# Altium PCB uartto485.PcbDoc
Units mil, origin at the board's own origin, x right, y up, seen from the top; angles counter-clockwise.
Board outline 2755.91 x 1751.97 mil, 2 copper layers (Top Layer, Bottom Layer); 14 components, 9 nets, 42 pads, 5 vias.
Unrouted connection lines stored in the file: 1.
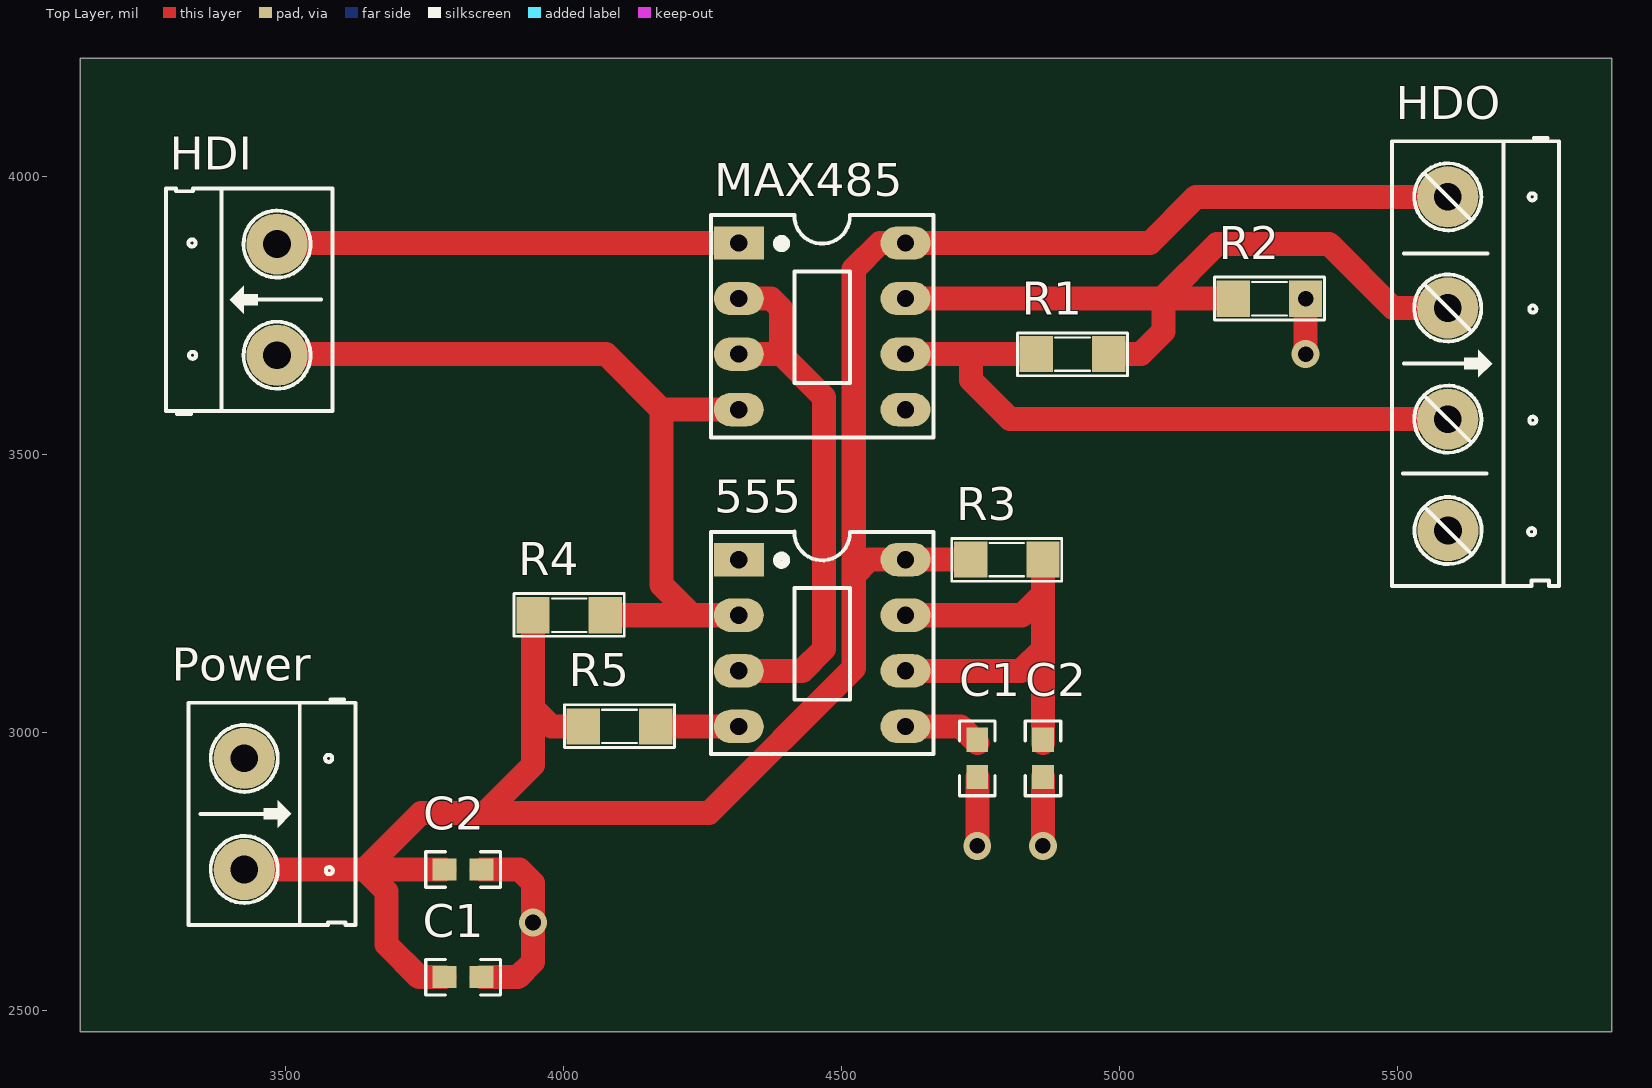
[diagram p0: Top Layer view]
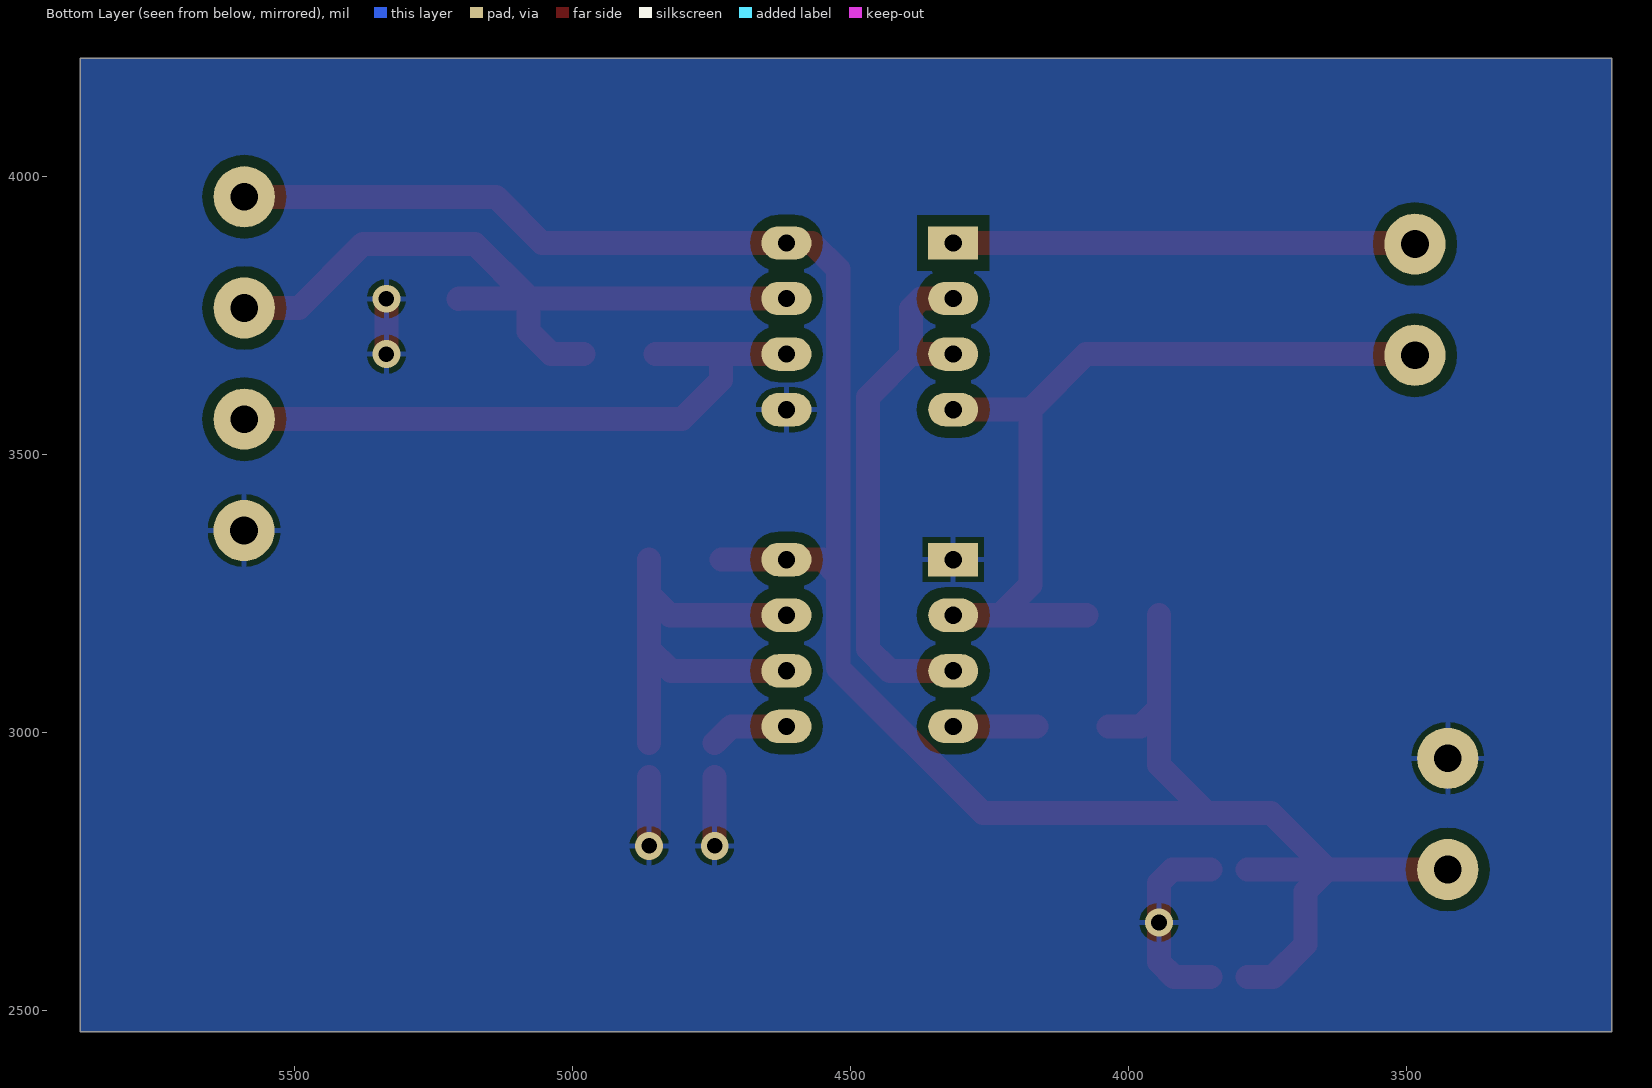
[diagram p1: Bottom Layer view, seen from below]
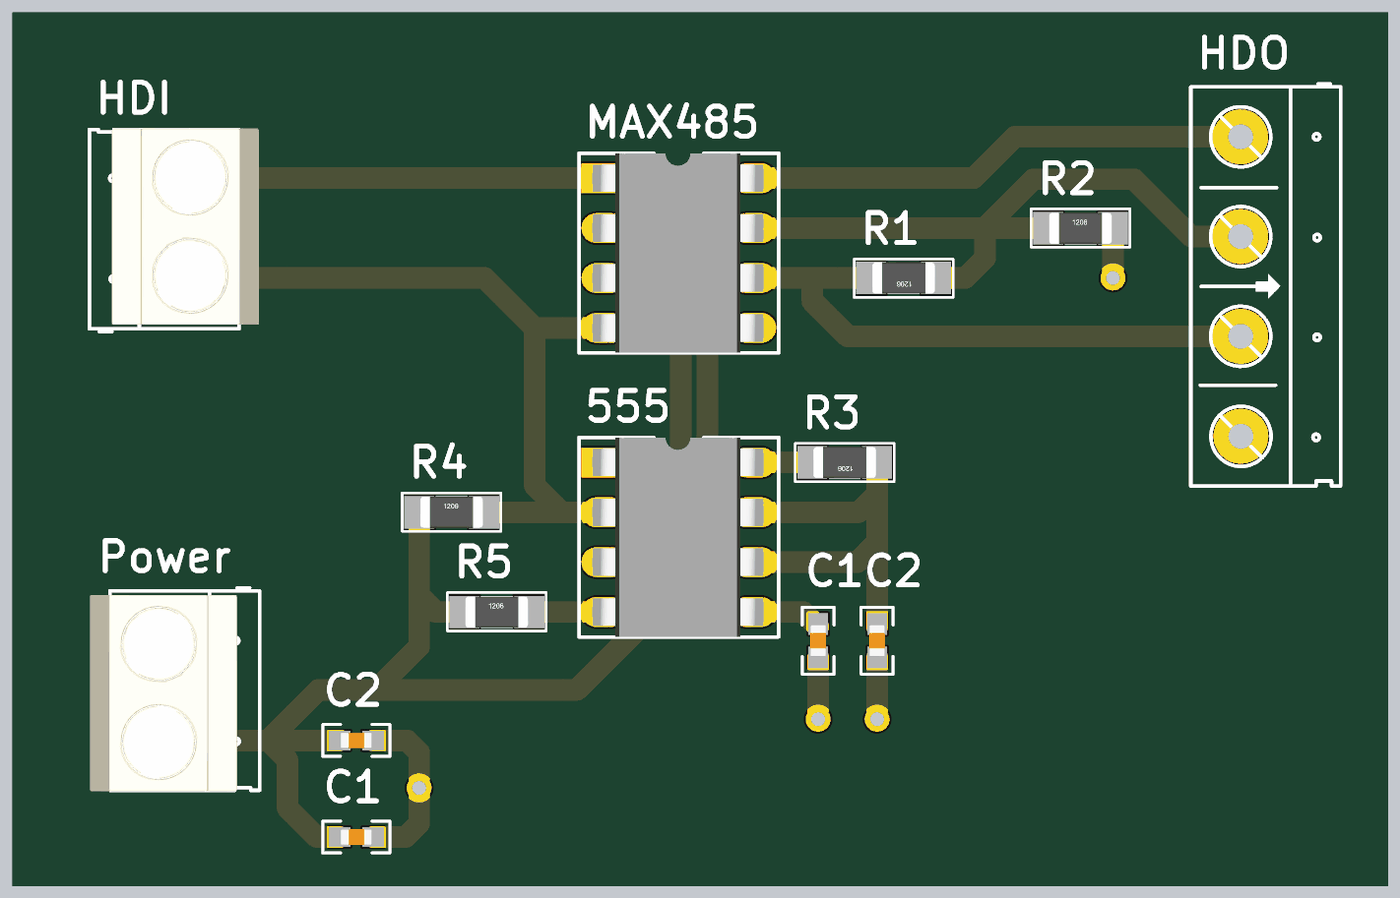
[diagram p2: 3D render of the assembled board from above, using the file's embedded part models]

## Layer stack, top to bottom
Top Solder: solder mask 0.4, Solder Resist, Dk 3.5
Top Layer: signal copper 1.4
Dielectric 1: dielectric 12.6, FR-4, Dk 4.8
Bottom Layer: signal copper 1.4
Bottom Solder: solder mask 0.4, Solder Resist, Dk 3.5

## Board outline
3129.92,4212.6 5885.83,4212.6 5885.83,2460.63 3129.92,2460.63

## Design rules (kind name [scope] priority, off if disabled: settings)
Clearance Clearance_1 [InNamedPolygon('Bottom Layer-No Net')] p1: gap=10 ignorepadtopadclearanceinfootprint=FALSE except(0: Arc-Hole Track-Hole SMDPad-Hole THPad-Hole Via-Hole Fill-Hole Poly-Hole Region-Hole Text-Hole; 20: Arc-Fill Arc-Poly Arc-Region Track-Fill Track-Poly Track-Region THPad-Fill THPad-Poly THPad-Region)
Clearance [All] p2: gap=10 ignorepadtopadclearanceinfootprint=FALSE except(0: Arc-Hole Track-Hole SMDPad-Hole THPad-Hole Via-Hole Fill-Hole Poly-Hole Region-Hole Text-Hole)
PolygonConnect PolygonConnect_2 [All vs IsNamedPolygon('Bottom Layer-No Net')] p1: connectstyle=Relief reliefconductorwidth=10 reliefentries=4 polygonreliefangle="90 Angle" airgapwidth=10
PolygonConnect PolygonConnect_1 [All vs IsNamedPolygon('Bottom Layer-No Net')] p2: connectstyle=Relief reliefconductorwidth=7.87 reliefentries=4 polygonreliefangle="90 Angle" airgapwidth=11.81
PolygonConnect [All] p3: connectstyle=Relief reliefconductorwidth=10 reliefentries=4 polygonreliefangle="90 Angle" airgapwidth=10
RoutingVias [All] p1: holewidth=28 width=50 viastyle="Through Hole" minholewidth=28 minwidth=50 maxholewidth=28 maxwidth=50
SolderMaskExpansion [All] p1: expansion=4
Width [All] p1: maxlimit=43.31 minlimit=35.43 preferedwidth=39.37
30 further rules are at their usual default settings.

## Classes and differential pairs
component class power: C1 C2 Power
component class uartto485: 555 C1 C2 HDI HDO MAX485 R1 R2 R3 R4 R5

## Components (designator, comment, footprint, x,y, rotation, side; value= is the part's Value field where it differs from the comment)
555 "LM555" DIP8/W0.3 4315,3310.24 r270 top
C1 "22uF" "CAPC-0603 (1608)" 3818.9,2559.06 r180 top value=33p/50V
C1 "10uF" "CAPC-0603 (1608)" 4744.09,2952.76 r90 top value=33p/50V
C2 "10uF" "CAPC-0603 (1608)" 4862.2,2952.76 r90 top value=33p/50V
C2 "22uF" "CAPC-0603 (1608)" 3818.9,2752.76 r180 top value=33p/50V
HDI "Header 2_1" HED2 3484.25,3677.95 r90 top value="Header 2"
HDO "Header 4" HED4 5590.49,3963.05 r270 top
MAX485 "MAX485" DIP8/W0.3 4315,3880 r270 top
Power "Header 2_1" HED2 3425.2,2952.76 r270 top value="Header 2"
R1 "120" SM-RES-1206 4980.31,3680 r180 top value="R1/4W - 1K"
R2 "20k" SM-RES-1206 5204.65,3779.53 r0 top value="R1/4W - 1K"
R3 "47k" SM-RES-1206 4862.2,3310.24 r180 top value="R1/4W - 1K"
R4 "10k" SM-RES-1206 3944.8,3210.24 r0 top value="R1/4W - 1K"
R5 "1k" SM-RES-1206 4035.43,3010.24 r0 top value="R1/4W - 1K"

## Footprints (in the part's own frame and the unit in brackets; to place one, negate y for a bottom-side part, rotate by r counter-clockwise, add the part's x,y. Pads: shape width x height; smd on the part's side, far side on the other; paste and mask are expansions set on the pad)
"CAPC-0603 (1608)" [mm] "Resistor, Chip; 1.60 mm L X 0.80 mm W X 0.50 mm H body"
  rect 1.1x1 smd mask+0.1: 1(-0.85,0) 2(0.85,0)
  silkscreen extent -1.71,-0.81 1.71,0.81, body extent -0.8,-0.4 0.8,0.4, height 0.6
DIP8/W0.3 [mil] "8 PIN, W 300mil, Pin to pin 100mil"
  rect 60x90 hole 31: 1(0,0)
  oval 60x90 hole 31: 2(100,0) 3(200,0) 4(300,0) 5(300,300) 6(200,300) 7(100,300) 8(0,300)
  silkscreen extent -50,-50 350,350, body extent -50,-40 350,336, height 201
HED2 [mil] "Header 2, 2 pin, hight 300mil, Pin to Pin 200, Colour Green"
  round 110 hole 50: 1(0,0) 2(200,0)
  silkscreen extent -106,-100 300,200, body extent -92,-140 302,155, height 394
HED4 [mil] "Header 4, 4 pin, hight 300mil, Pin to Pin 200, Colour Green"
  round 110 hole 50: 1(0,0) 2(200,0) 3(400.06,0.06) 4(600.39,0.39)
  silkscreen extent -106,-100 700,200
SM-RES-1206 [mil]
  rect 60x65 smd: 1(0,0) 2(130,0)
  silkscreen extent -34,-38 164,39, body extent 2,-31 128,32, height 40

## Part data
555: "Timer"
C1 C1 C2 C2: library part 0603N330J500CT, "CAP CER 33pF 50V 5%  0603", MPN="CL10C330JB8NNNC, 0603N330J500CT", Category=CAPACITOR, CompanyID=VT-01106, PinCount=2, Solder=SMT
HDI Power: "Header, 2-Pin", Manufacturer="Generic Components", Class=Connector
HDO: library part Hed4, "Header 4 (Green)"
MAX485: "RS232 - RS485 (Same sn75176)"
R1 R2 R3 R4 R5: library part R, "Resistor 1/4W"

## Via types
v1: diameter 50, hole 28, Top Layer to Bottom Layer, 5 vias

## Nets (pads, with @x,y where several pads share a name; then routed paths per layer and width w, separated by ;. In a path a pad name is that pad's centre, name@x,y a point inside that pad or via, vN(x,y) a via of type N, cw(c..) or ccw(c..) an arc to the next point about the centre after c; other vN are vias at no path point)
GND: 555.1 C1.1 C2.1 HDO.4 MAX485.5 Power.1 R2.2 | length 695.8
  Top Layer w43.31: C1.1@3852.36,2559.06 3917.32,2559.06 3944.8,2586.54 3944.8,2728.43 3920.47,2752.76 C2.1@3852.36,2752.76 ; v1(4744.09,2795.28) C1.1@4744.09,2919.29 ; v1(4862.2,2795.28) C2.1@4862.2,2919.29 ; v1(5334.65,3680) v1(5334.65,3779.53)
  other v1: 3944.8,2657.48
Net555_2: 555.2 HDI.1 MAX485.4 R4.2 | length 1524.5
  Top Layer w43.31: HDI.1@3464.57,3680 4075.91,3680 4175.91,3580 ; R4.2 4230.71,3210.24 ; 555.2 4230.71,3210.24 ; MAX485.4 4175.91,3580 ; 4175.91,3580 4175.91,3265.04 4230.71,3210.24
Net555_3: 555.3 MAX485.2 MAX485.3 | length 973.5
  Top Layer w43.31: 555.3 4429.13,3110.24 4468.5,3149.61 4468.5,3602.36 4390.87,3680 ; MAX485.3 4390.87,3680 ; MAX485.2 4372.82,3780 4390.87,3761.95 4390.87,3680
Net555_4: 555.4 R5.2 | length 160.6
  Top Layer w43.31: R5.2 555.4@4325.98,3010.24
Net555_5: 555.5 C1.2@4744.09,2986.22 | length 141.5
  Top Layer w43.31: 555.5 4714.17,3010.24 C1.2@4744.09,2980.32
Net555_6: 555.6 555.7 C2.2@4862.2,2986.22 R3.1 | length 856.3
  Top Layer w43.31: 555.6 4822.83,3110.24 4862.2,3149.61 ; 555.7 4824.41,3210.24 4862.2,3248.03 ; C2.2@4862.2,2980.32 4862.2,3149.61 ; R3.1 4862.2,3248.03 ; 4862.2,3149.61 4862.2,3248.03
NetHDI_2: HDI.2 MAX485.1 | length 850.4
  Top Layer w43.31: HDI.2@3464.57,3880 MAX485.1
NetHDO_2: HDO.2 MAX485.7 R1.1 R2.1 | length 1365.4
  Top Layer w43.31: MAX485.7 5078.74,3780 ; R1.1 5038.27,3680 5078.74,3720.47 5078.74,3780 ; R2.1 5204.17,3780 5078.74,3780 ; HDO.2 5492.13,3763.05 5377.23,3877.95 5175.12,3877.95 5078.74,3781.57 5078.74,3780
VCC: 555.8 C1.2@3785.43,2559.06 C2.2@3785.43,2752.76 HDO.1 HDO.3 MAX485.6 MAX485.8 Power.2 R1.2 R3.2 R4.1 R5.1 | length 5397.9
  Top Layer w43.31: Power.2 3641.73,2752.76 ; C1.2@3785.43,2559.06 3740.16,2559.06 3681.1,2618.11 3681.1,2713.39 3641.73,2752.76 ; C2.2@3785.43,2752.76 3641.73,2752.76 ; R4.1 3944.8,3043.39 ; R5.1 3977.95,3010.24 3944.8,3043.39 ; MAX485.6 4732.66,3680 ; R3.2 555.8 4550.39,3310.24 4521.81,3281.65 ; R1.2 4732.66,3680 ; HDO.1 5137.8,3963.05 5054.74,3880 MAX485.8 4568.98,3880 4521.81,3832.83 4521.81,3281.65 ; HDO.3 4803.15,3562.99 4732.66,3633.48 4732.66,3680 ; 3641.73,2752.76 3743.31,2854.33 3858.27,2854.33 ; 3858.27,2854.33 4261.29,2854.33 4521.81,3114.86 4521.81,3281.65 ; 3858.27,2854.33 3944.8,2940.87 3944.8,3043.39

## Polygon pours and split planes (outlines as drawn)
GND on Bottom Layer "Bottom Layer-No Net" (solid, pour order 4): 3129.92,4212.6 5885.83,4212.6 5885.83,2460.63 3129.92,2460.63